# Altium PCB Motor Driver.PcbDoc
Units mil, origin at the board's own origin, x right, y up, seen from the top; angles counter-clockwise.
Board outline 1815.03 x 1805.03 mil, 4 copper layers (Top Layer, Signal Layer, GND, Bottom Layer), stack 23.756 mil thick; 42 components, 39 nets, 193 pads, 56 vias.
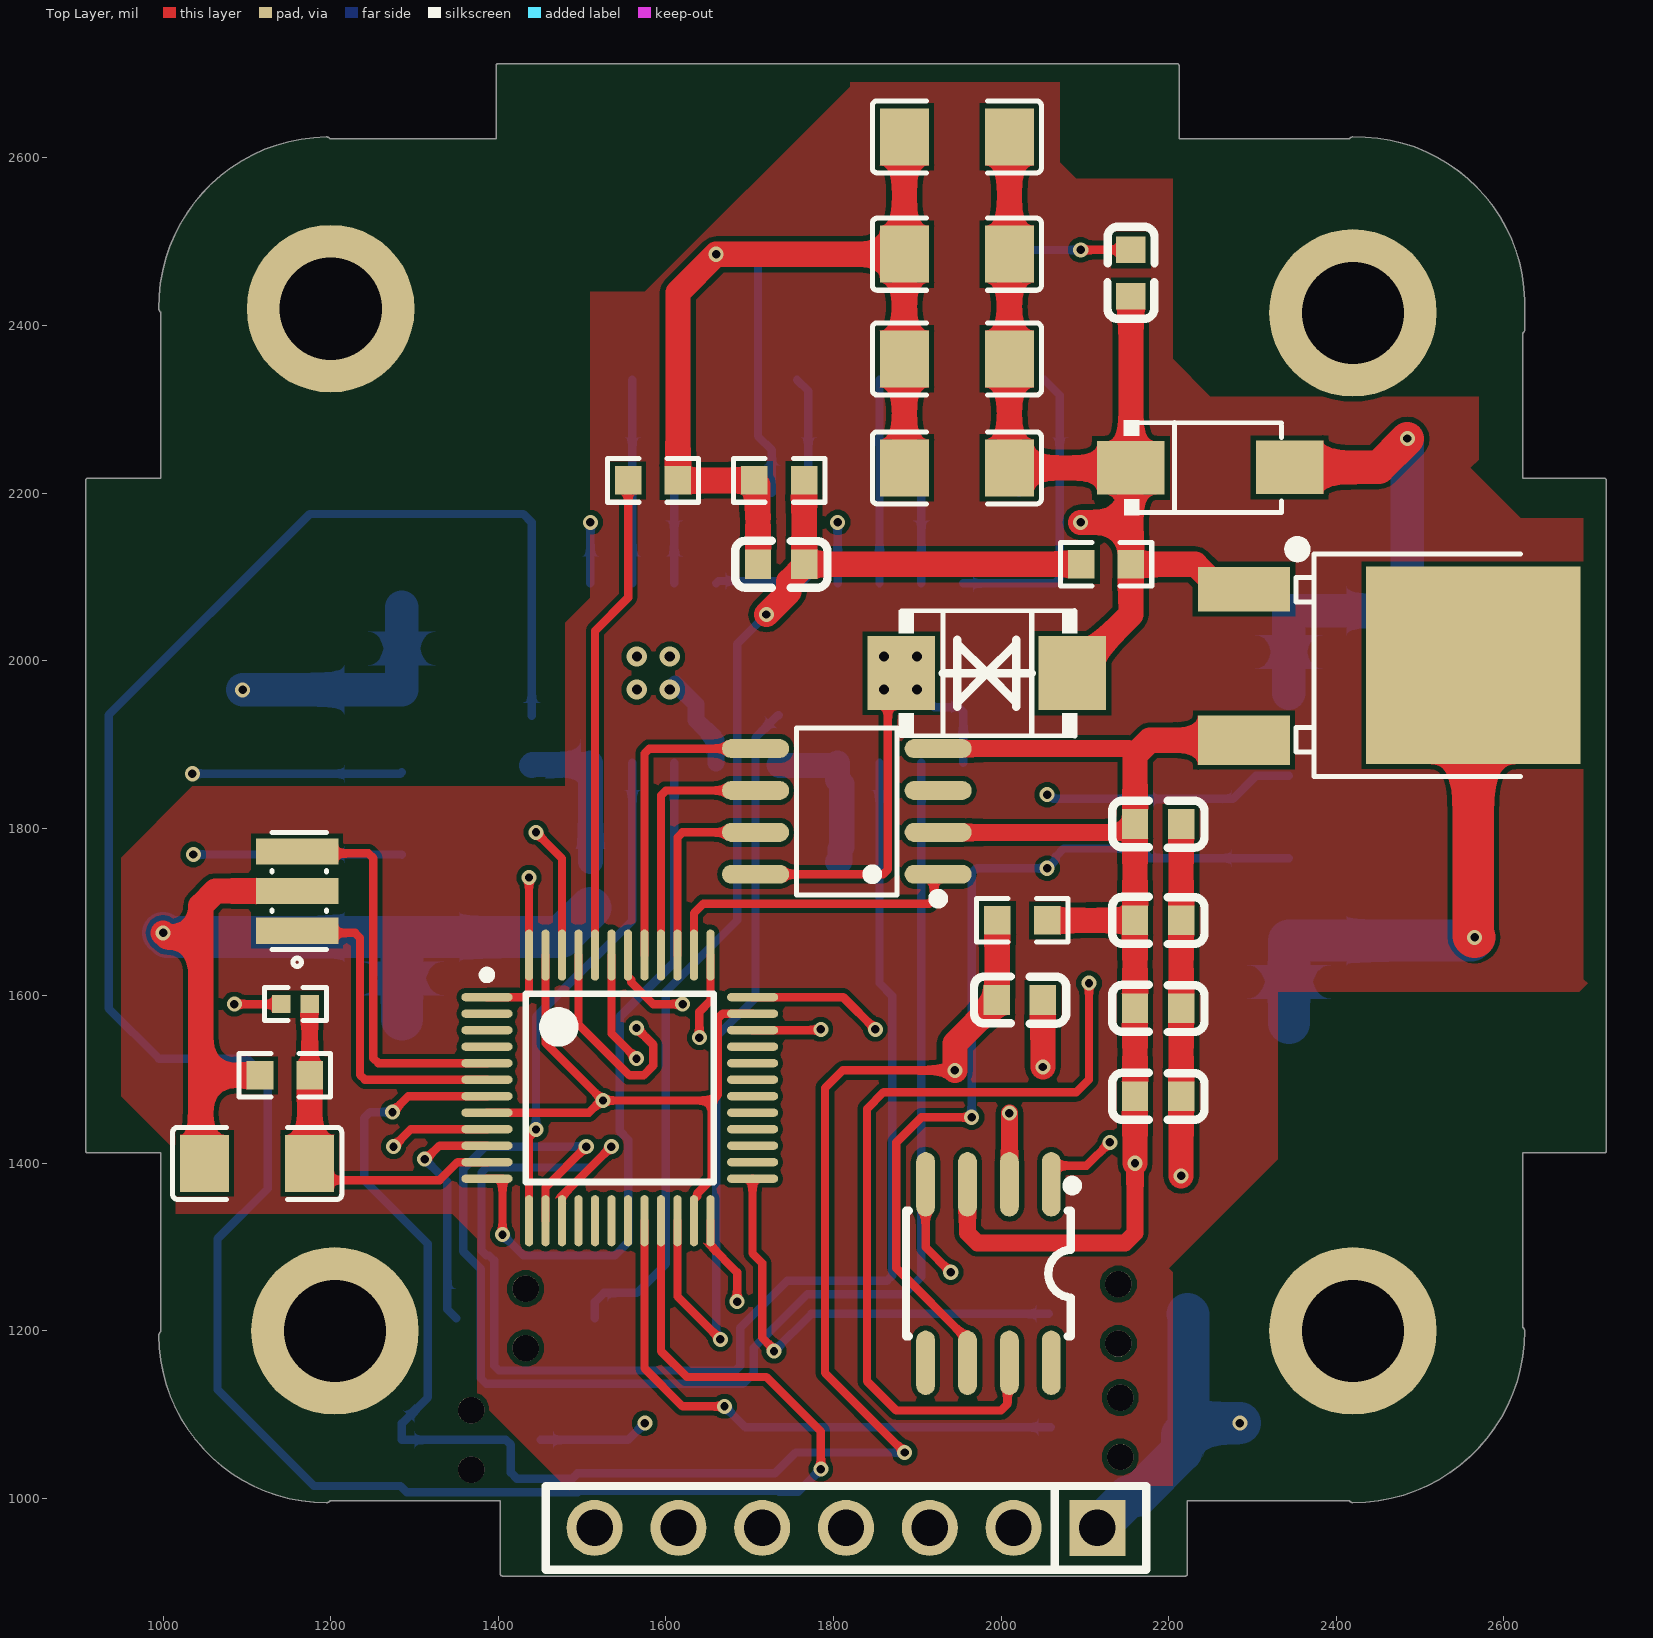
[diagram p0: Top Layer view]
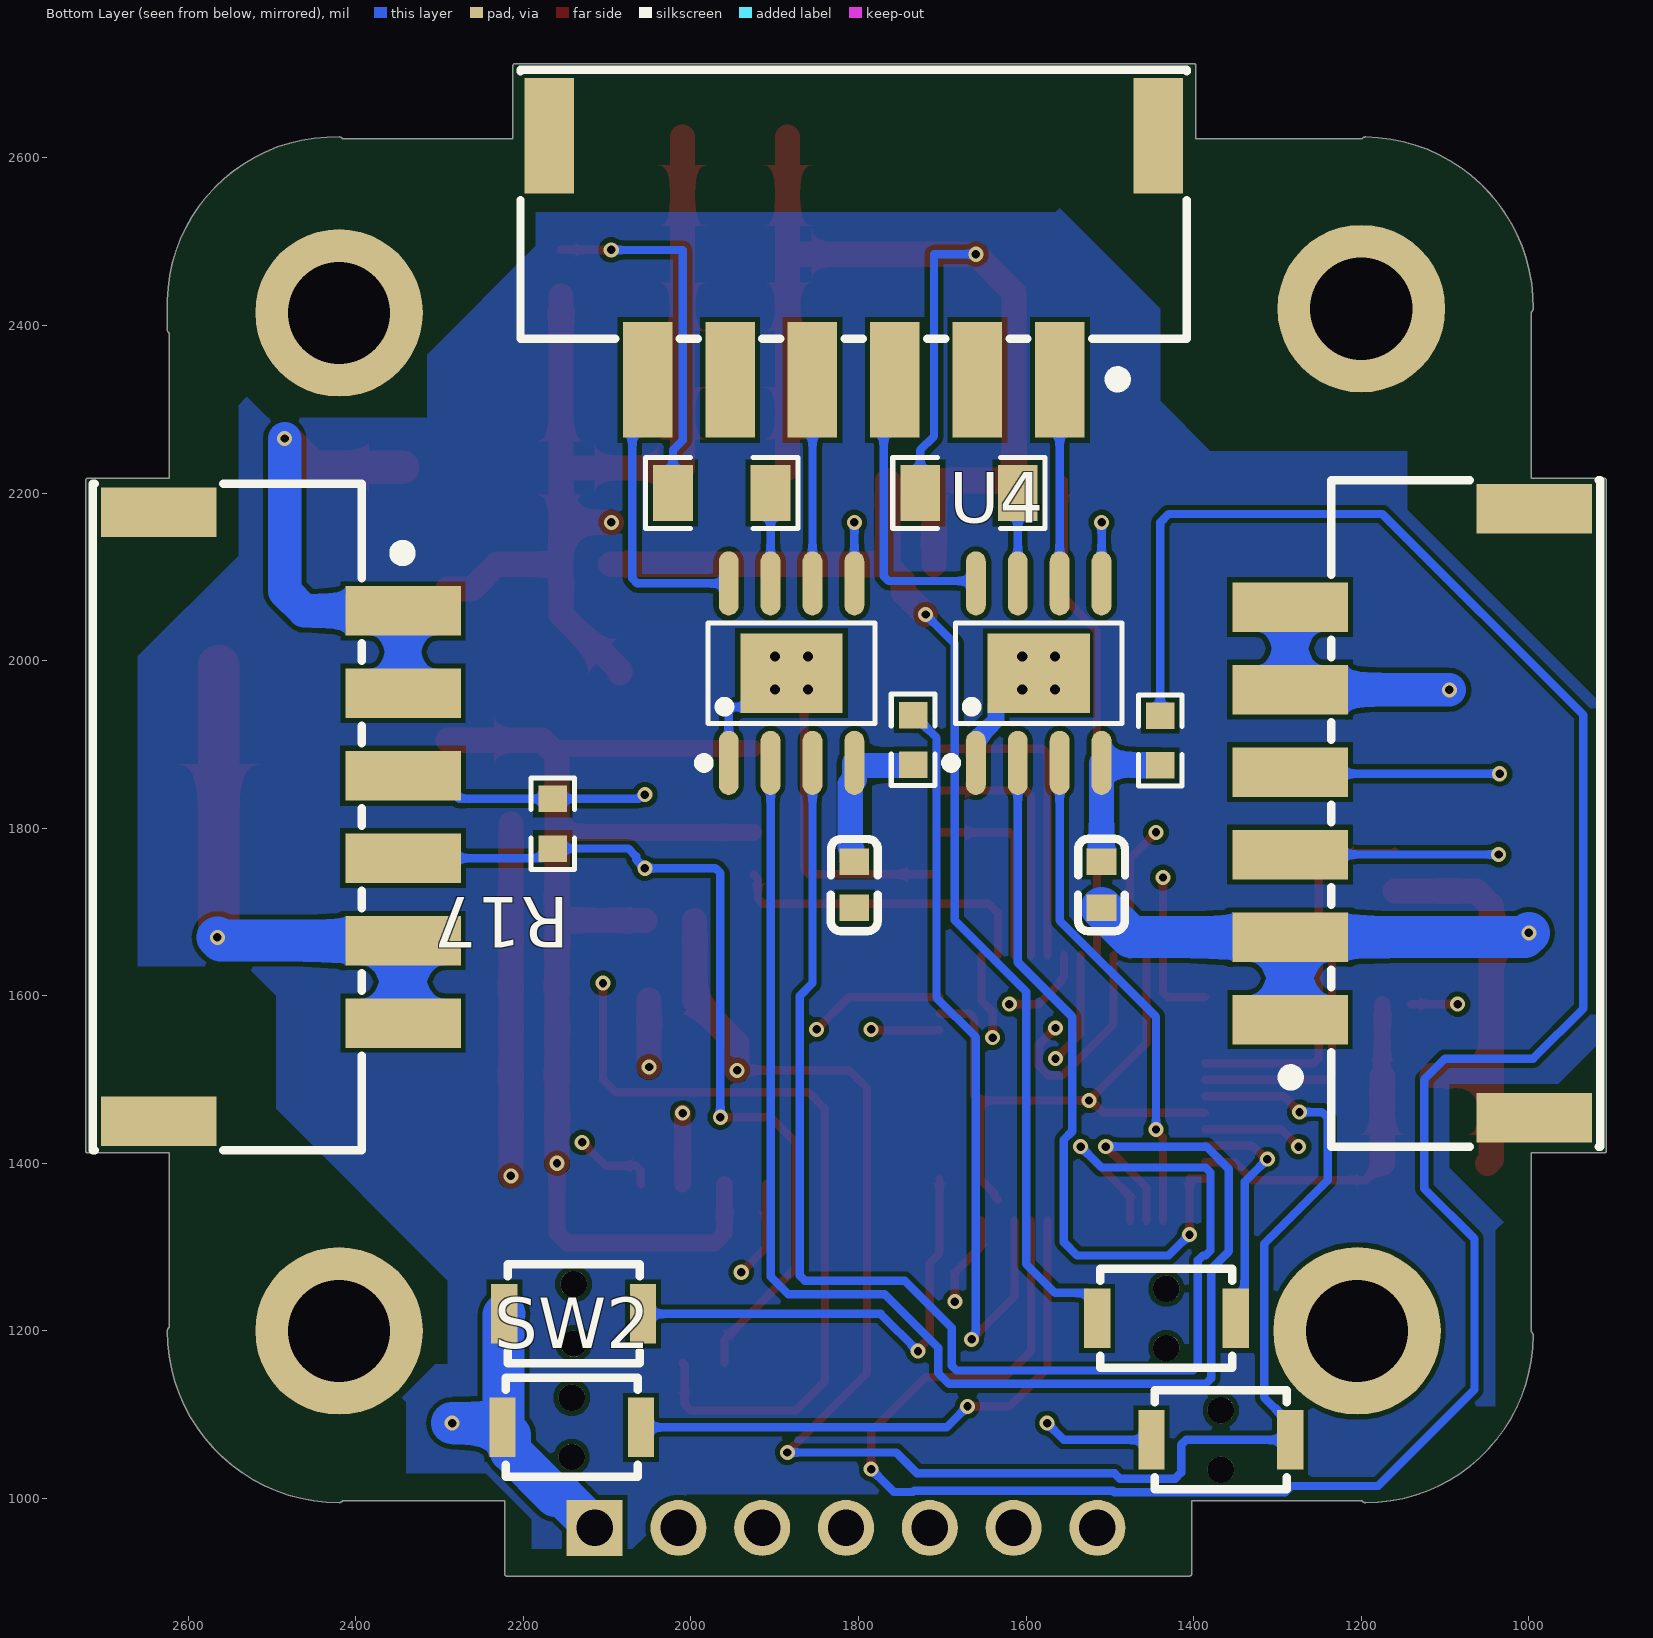
[diagram p1: Bottom Layer view, seen from below]
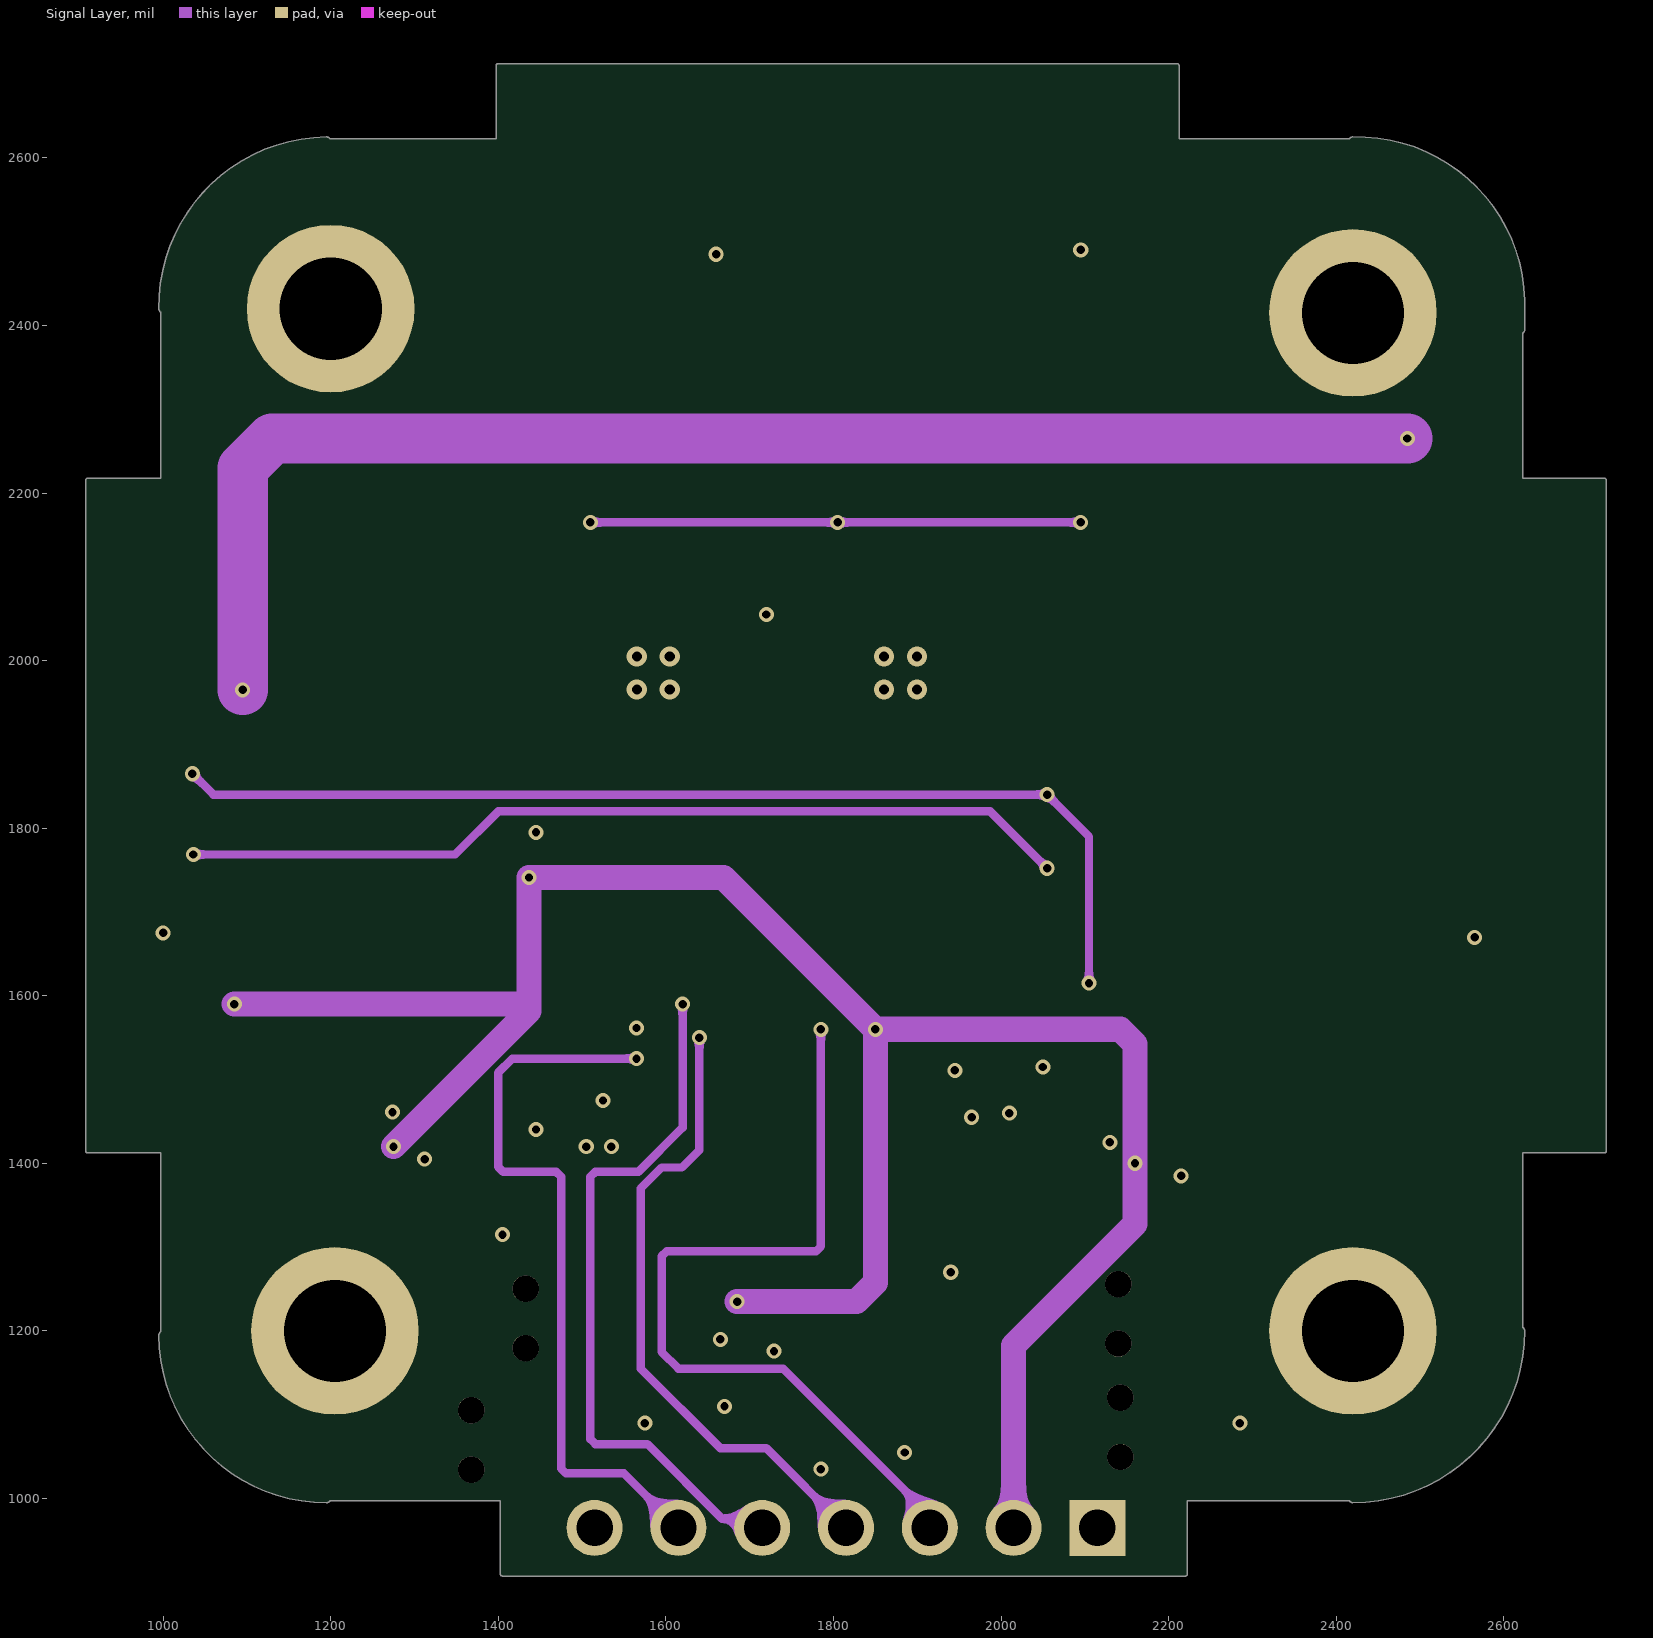
[diagram p2: Signal Layer]
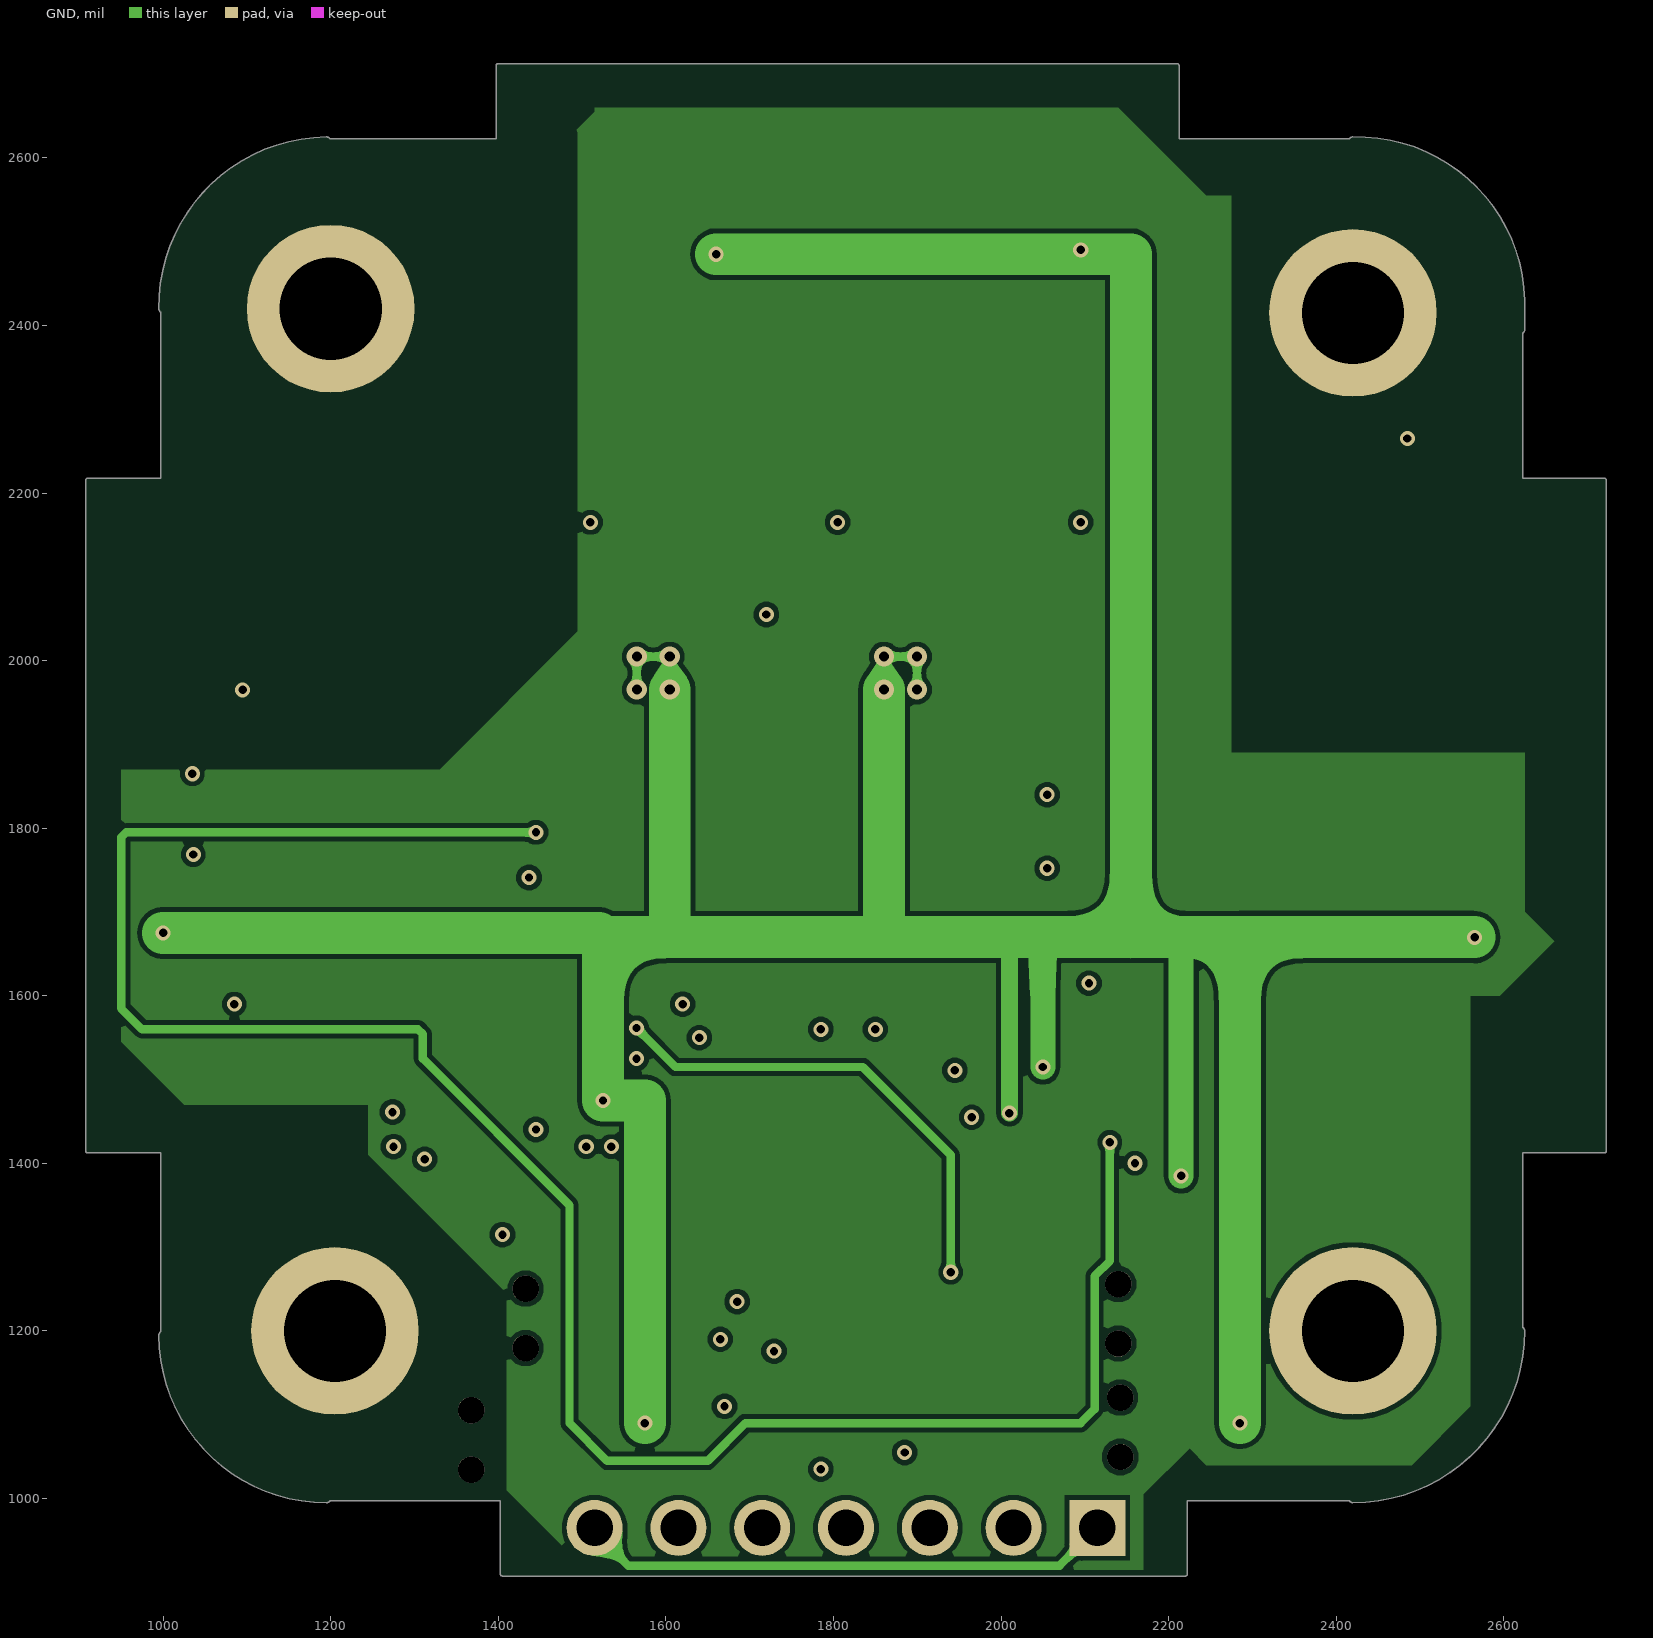
[diagram p3: GND]

## Layer stack, top to bottom
Top Solder: solder mask 0.4, Solder Resist, Dk 3.5
Top Layer: signal copper 1.4
Dielectric 2: prepreg 2.8, PP-006, Dk 4.1
Signal Layer: signal copper 1.378
Dielectric 1: dielectric 12.6, FR-4, Dk 4.8
GND: signal copper 1.378
Dielectric 3: prepreg 2.8, PP-006, Dk 4.1
Bottom Layer: signal copper 1.4
Bottom Solder: solder mask 0.4, Solder Resist, Dk 3.5

## Board outline
994.99,1195 cw(c1000,1195) 997.49,1199.34 997.49,1412.48 910,1412.48 cw(c910,1415) 907.49,1415 907.49,2215 cw(c910,2215) 910,2217.51 997.49,2217.51 997.49,2415.66 cw(c1000,2420) 994.99,2419.94 cw(c1197.5,2422.5) 1194.94,2625.01 cw(c1195,2620) 1199.34,2622.52 1397.48,2622.52 1397.48,2710 cw(c1400,2710) 1400,2712.52 2210,2712.52 cw(c2210,2710) 2212.51,2710 cw(c2210,2710) 2212.51,2710 2212.51,2622.51 2415.66,2622.51 cw(c2420,2620) 2419.87,2625.01 cw(c2425,2425) 2625.01,2430.13 cw(c2620,2430) 2625.01,2430 2625.01,2395 cw(c2620,2395) 2622.51,2390.66 2622.51,2217.51 2720,2217.51 cw(c2720,2215) 2722.51,2215 2722.51,1415 cw(c2720,1415) 2720,1412.48 2622.51,1412.48 2622.51,1204.34 cw(c2620,1200) 2625.01,1200 cw(c2420,1200) 2420,994.99 cw(c2420,1000) 2415.66,997.49 2222.51,997.49 2222.51,910 cw(c2220,910) 2220,907.49 1405,907.49 cw(c1405,910) 1402.48,910 1402.48,997.49 1199.34,997.49 cw(c1195,1000) 1195,994.99 cw(c1195,1195)

## Design rules (kind name [scope] priority, off if disabled: settings)
Clearance [All] p1: gap=6 ignorepadtopadclearanceinfootprint=FALSE
ComponentClearance [All] p1: gap=0 collisioncheckmode=3 verticalgap=0 showdistances=FALSE
HoleSize [All] p1: absolutevalues=TRUE maxlimit=10000 minlimit=8 maxpercent=80.000 minpercent=20.000
MinimumSolderMaskSliver [All] p1: minsoldermaskwidth=1
PolygonConnect [All] p1: connectstyle=Relief reliefconductorwidth=10 reliefentries=4 polygonreliefangle="90 Angle" airgapwidth=10
RoutingVias [All] p1: holewidth=28 width=50 viastyle="Through Hole" minholewidth=28 minwidth=50 maxholewidth=28 maxwidth=50
SilkToSilkClearance [All] p1: silktosilkclearance=0
SilkToSolderMaskClearance [IsPad] p1: minsilkscreentomaskgap=0 clearancetoexposedcopper=TRUE
SolderMaskExpansion [All] p1: expansion=4 istentingtop=FALSE
Width [All] p1: maxlimit=1000 minlimit=10 preferedwidth=10
25 further rules are at their usual default settings.

## Classes and differential pairs
component class Port: R17 SW2
component class Drive: U4

## Components (designator, comment, footprint, x,y, rotation, side; value= is the part's Value field where it differs from the comment)
C1 "100uF" C1206 1947.3,2625 r180 top
C2 "100uF" C1206 1947.3,2485 r180 top
C3 "100uF" C1206 1947.3,2230 r180 top
C4 "100uF" C1206 1947.3,2360 r180 top
C5 "100nF" C0603 2155,2462.55 r270 top
C6 "1uF" C0603 2187.44,1805 r180 top
C7 "1uF" C0603 2187.44,1690 r180 top
C8 "100nF" C0603 2187.45,1585 r180 top
C9 "100nF" C0603 2187.44,1480 r180 top
C14 "100nF" C0603 1805,1732.44 r90 bottom
C16 "100nF" C0603 1510,1732.56 r90 bottom
C18 "10uF" C1206 1112.3,1400 r0 top
C19 "100nF" C0603 2022.44,1595 r180 top
C26 "100nF" C0603 1737.56,2115 r180 top
CN1 "WAFER-254W-6P" CONN-SMD_WAFER-254W-6P 2489.33,1813.38 r270 bottom
CN2 "WAFER-254W-6P" CONN-SMD_WAFER-254W-6P 1139.33,1817.64 r90 bottom
CN3 "WAFER-254W-6P" CONN-SMD_WAFER-254W-6P 1805.79,2480.67 r0 bottom
D1 "SS54" SMA_L4.3-W2.6-LS5.0-RD 2249.65,2230.37 r0 top
D2 "SMBJ28CA" SMB_L4.6-W3.6-LS5.3-BI 1982.98,1985 r0 top
H1 "PZ254V-11-07P" HDR-TH_7P-P2.54-V-M 1815,965 r180 top
R4 "1K" R0603 1735,1905.35 r270 bottom
R6 "1K" R0603 1440,1904.66 r270 bottom
R8 "0.1" R1206 1963.22,2200 r0 bottom
R9 "0.1" R1206 1668.22,2200 r0 bottom
R10 "NTCThermistor" R0402 1157.96,1590 r0 top
R11 "3.3K" R0603_NEW 1145.35,1505 r0 top
R12 "10K" R0603 1584.66,2215 r0 top
R13 "10K" R0603 2025.35,1690 r0 top
R17 "120" R0603 2165,1805.35 r270 bottom
R19 "10K" R0603 2125.34,2115 r180 top
R20 "1K" R0603 1735.34,2215 r180 top
SW1 "K2-1807UA-A4DW-06" KEY-SMD_L4.0-W2.9-L 2140,1220.43 r180 bottom
SW2 "K2-1807UA-A4DW-06" KEY-SMD_L4.0-W2.9-L 2142.32,1085 r180 bottom
SW3 "K2-1807UA-A4DW-06" KEY-SMD_L4.0-W2.9-L 1367.68,1070 r0 bottom
SW4 "K2-1807UA-A4DW-06" KEY-SMD_L4.0-W2.9-L 1432.68,1215 r180 bottom
U1 "L78M05CDT-TR" TO-252-2_L6.5-W6.1-P4.58-LS10.0-TL 2426.81,1995.16 r0 top
U3 "A4950ELJTR-T" SOIC-8_L4.9-W3.9-P1.27-LS6.0-BL-EP 1880,1985 r180 bottom
U4 "A4950ELJTR-T" SOIC-8_L4.9-W3.9-P1.27-LS6.0-BL-EP 1585,1985 r180 bottom
U5 "STM32F103C8T6" STM-LQFP48_L 1545,1490 r0 top
U6 "SN65HVD232DR" SOIC-8_L5.0-W4.0-P1.27-LS6.0-BL 1985,1268.5 r180 top
U7 "MT6816CT-ACD" SOP-8_L5.0-W4.0-P1.27-LS6.0-BL 1816.03,1820 r90 top
X1 "12MHz" CRYSTAL-SMD_3P-L3.2-W1.3-P1.2-BL 1160,1725 r90 top

## Footprints (in the part's own frame and the unit in brackets; to place one, negate y for a bottom-side part, rotate by r counter-clockwise, add the part's x,y. Pads: shape width x height; smd on the part's side, far side on the other; paste and mask are expansions set on the pad)
C0603 [mm]
  rect 0.8x0.9 smd: 1(-0.7,0) 2(0.7,0)
  silkscreen extent -1.41,-0.71 1.39,0.72
C1206 [mm]
  rect 1.485x1.728 smd: 1(-1.593,0) 2(1.593,0)
  silkscreen extent -2.56,-1.09 2.56,1.09
CONN-SMD_WAFER-254W-6P [mm]
  rect 1.5x3.5 smd: 1(-6.25,3.7) 2(-3.75,3.7) 3(-1.25,3.7) 4(1.25,3.7) 5(3.75,3.7) 6(6.25,3.7) 7(-9.23,-3.7) 8(9.23,-3.7)
  silkscreen extent -10.1,-5.7 10.1,3.88
CRYSTAL-SMD_3P-L3.2-W1.3-P1.2-BL [mm]
  rect 0.8x2.5 smd: 1(-1.2,0) 2(0,0) 3(1.2,0)
  silkscreen extent -2.29,-0.89 1.78,0.76
HDR-TH_7P-P2.54-V-M [mm]
  rect 1.7x1.7 hole 1.1: 1(-7.62,0)
  round 1.7 hole 1.1: 2(-5.08,0) 3(-2.54,0) 4(0,0) 5(2.54,0) 6(5.08,0) 7(7.62,0)
  silkscreen extent -9.1,-1.27 9.1,1.27
KEY-SMD_L4.0-W2.9-L [mm]
  rect 0.8x1.8 smd: 1(-2.1,0) 2(2.1,0)
  round 0.8 hole 0.8 unplated: ""(0,-0.9) ""(0,0.9)
  silkscreen extent -2,-1.5 2,1.5
R0402 [mm]
  rect 0.566x0.54 smd: 1(-0.433,0) 2(0.433,0)
  silkscreen extent -0.94,-0.5 0.94,0.5
R0603 [mil]
  rect 31.75x34.02 smd: 1(-29.65,0) 2(29.66,0)
  silkscreen extent -55,-26 55,26
R0603_NEW [mil]
  rect 31.75x34.02 smd: 1(-29.65,0) 2(29.65,0)
  silkscreen extent -55,-26 55,26
R1206 [mil]
  rect 47.54x66.97 smd: 1(-58.22,0) 2(58.22,0)
  silkscreen extent -91,-42 91,42
SMA_L4.3-W2.6-LS5.0-RD [mm]
  rect 2.046x1.62 smd: 1(-2.404,-0.009) 2(2.404,0.009)
  silkscreen extent -2.61,-1.44 2.16,1.44
SMB_L4.6-W3.6-LS5.3-BI [mil]
  rect 80.61x88.23 smd: 1(-102.02,0) 2(102.02,0)
  silkscreen extent -105,-75 108,75
SOIC-8_L4.9-W3.9-P1.27-LS6.0-BL-EP [mm]
  oval 0.602x1.941 smd: 1(-1.905,-2.72) 2(-0.635,-2.72) 3(0.635,-2.72) 4(1.905,-2.72) 5(1.905,2.72) 6(0.635,2.72) 7(-0.635,2.72) 8(-1.905,2.72)
  rect 3.098x2.41 smd: 9(0,0)
  silkscreen extent -2.81,-2.87 2.53,1.52
SOIC-8_L5.0-W4.0-P1.27-LS6.0-BL [mil]
  oval 22.38x76.78 smd: 1(-75,-106.5) 2(-25,-106.5) 3(25,-106.5) 4(75,-106.5) 5(75,106.5) 6(25,106.5) 7(-25,106.5) 8(-75,106.5)
  silkscreen extent -106,-111 98,75
SOP-8_L5.0-W4.0-P1.27-LS6.0-BL [mil]
  oval 22.6x80.14 smd: 1(-75,-108.97) 2(-25,-108.97) 3(25,-108.97) 4(75,-108.97) 5(75,108.97) 6(25,108.97) 7(-25,108.97) 8(-75,108.97)
  silkscreen extent -110,-115 99,60
STM-LQFP48_L [mm] "QFP, 48-Leads, Body 7x7mm, Pitch 0.5mm, IPC High Density"
  oval 1.55x0.25 smd: 1(-4.025,2.75) 2(-4.025,2.25) 3(-4.025,1.75) 4(-4.025,1.25) 5(-4.025,0.75) 6(-4.025,0.25) 7(-4.025,-0.25) 8(-4.025,-0.75) 9(-4.025,-1.25) 10(-4.025,-1.75) 11(-4.025,-2.25) 12(-4.025,-2.75) 25(4.025,-2.75) 26(4.025,-2.25) 27(4.025,-1.75) 28(4.025,-1.25) 29(4.025,-0.75) 30(4.025,-0.25) 31(4.025,0.25) 32(4.025,0.75) 33(4.025,1.25) 34(4.025,1.75) 35(4.025,2.25) 36(4.025,2.75)
  oval 0.25x1.55 smd: 13(-2.75,-4.025) 14(-2.25,-4.025) 15(-1.75,-4.025) 16(-1.25,-4.025) 17(-0.75,-4.025) 18(-0.25,-4.025) 19(0.25,-4.025) 20(0.75,-4.025) 21(1.25,-4.025) 22(1.75,-4.025) 23(2.25,-4.025) 24(2.75,-4.025) 37(2.75,4.025) 38(2.25,4.025) 39(1.75,4.025) 40(1.25,4.025) 41(0.75,4.025) 42(0.25,4.025) 43(-0.25,4.025) 44(-0.75,4.025) 45(-1.25,4.025) 46(-1.75,4.025) 47(-2.25,4.025) 48(-2.75,4.025)
  silkscreen extent -4.15,-2.85 2.85,3.55, body extent -3.5,-3.5 3.5,3.5, height 1.6
TO-252-2_L6.5-W6.1-P4.58-LS10.0-TL [mm]
  rect 2.8x1.35 smd: 1(-3.475,2.29)
  rect 2.8x1.5 smd: 3(-3.475,-2.29)
  rect 6.5x6 smd: 4(3.475,-0.017)
  silkscreen extent -2.06,-3.39 4.9,3.7

## Part data
C1 C2 C3 C4: BOM_JLCPCB Part Class="Extended Part", BOM_Manufacturer="Murata Electronics", BOM_Manufacturer Part=GRM31CR61A107ME05L, BOM_Supplier=LCSC, BOM_Supplier Part=C312983, Contributor=LCSC, nameAlias=Capacitance, spicePre=C, spiceSymbolName=GRM31CR61A107ME05L
C5 C8 C9 C14 C16 C19 C26: BOM_JLCPCB Part Class="Extended Part", BOM_Manufacturer=SAMSUNG, BOM_Manufacturer Part=CL10B104KB8NNNC, BOM_Supplier=LCSC, BOM_Supplier Part=C1591, nameAlias=Capacitance, spicePre=C, spiceSymbolName=CL10B104KB8NNNC
C6 C7: BOM_JLCPCB Part Class="Basic Part", BOM_Manufacturer=SAMSUNG, BOM_Manufacturer Part=CL10A105KB8NNNC, BOM_Supplier=LCSC, BOM_Supplier Part=C15849, nameAlias=Capacitance, spicePre=C, spiceSymbolName=CL10A105KB8NNNC
C18: BOM_JLCPCB Part Class="Basic Part", BOM_Manufacturer=SAMSUNG, BOM_Manufacturer Part=CL31A106KBHNNNE, BOM_Supplier=LCSC, BOM_Supplier Part=C13585, nameAlias=Capacitance, spicePre=C, spiceSymbolName=CL31A106KBHNNNE
CN1 CN2 CN3: BOM_Manufacturer=XUNPU(讯普), BOM_Manufacturer Part=WAFER-254W-6P, BOM_Supplier=LCSC, BOM_Supplier Part=C2856747, Contributor=LCSC, spicePre=C, spiceSymbolName=WAFER-254W-6P
D1: library part SS54_C727065, BOM_JLCPCB Part Class="Extended Part", BOM_Manufacturer=TWGMC, BOM_Manufacturer Part=SS54, BOM_Supplier=LCSC, BOM_Supplier Part=C727065, Contributor=LCSC, spicePre=D, spiceSymbolName=SS54_C727065
D2: library part SMBJ28CA_C908204, BOM_JLCPCB Part Class="Extended Part", BOM_Manufacturer=FUXINSEMI, BOM_Manufacturer Part=SMBJ28CA, BOM_Supplier=LCSC, BOM_Supplier Part=C908204, Contributor=LCSC, spicePre=D, spiceSymbolName=SMBJ28CA_C908204
H1: BOM_JLCPCB Part Class="Extended Part", BOM_Manufacturer=XFCN, BOM_Manufacturer Part=PZ254V-11-07P, BOM_Supplier=LCSC, BOM_Supplier Part=C492406, Contributor=LCSC, spicePre=H, spiceSymbolName=PZ254V-11-07P
R4 R6 R20: BOM_JLCPCB Part Class="Basic Part", BOM_Manufacturer=UniOhm, BOM_Manufacturer Part=0603WAF1001T5E, BOM_Supplier=LCSC, BOM_Supplier Part=C21190, nameAlias="Resistance (Ohms)", spicePre=R, spiceSymbolName=0603WAF1001T5E
R8 R9: BOM_JLCPCB Part Class="Basic Part", BOM_Manufacturer=UniOhm, BOM_Manufacturer Part=1206W4F100LT5E, BOM_Supplier=LCSC, BOM_Supplier Part=C25334, nameAlias="Resistance (Ohms)", spicePre=R, spiceSymbolName=1206W4F100LT5E
R10: BOM_JLCPCB Part Class="Extended Part", BOM_Manufacturer=MuRata, BOM_Manufacturer Part=NCP15XH103F03RC, BOM_Supplier=LCSC, BOM_Supplier Part=C77131, nameAlias=Value, spicePre=R, spiceSymbolName=NCP15XH103F03RC
R11: BOM_JLCPCB Part Class="Basic Part", BOM_Manufacturer=UniOhm, BOM_Manufacturer Part=0603WAF3301T5E, BOM_Supplier=LCSC, BOM_Supplier Part=C22978, nameAlias="Resistance (Ohms)", spicePre=R, spiceSymbolName=0603WAF3301T5E
R12 R13 R19: BOM_JLCPCB Part Class="Basic Part", BOM_Manufacturer=UniOhm, BOM_Manufacturer Part=0603WAF1002T5E, BOM_Supplier=LCSC, BOM_Supplier Part=C25804, nameAlias="Resistance (Ohms)", spicePre=R, spiceSymbolName=0603WAF1002T5E
R17: BOM_JLCPCB Part Class="Basic Part", BOM_Manufacturer=UniOhm, BOM_Manufacturer Part=0603WAF1200T5E, BOM_Supplier=LCSC, BOM_Supplier Part=C22787, nameAlias="Resistance (Ohms)", spicePre=R, spiceSymbolName=0603WAF1200T5E
SW1 SW2 SW3 SW4: BOM_JLCPCB Part Class="Extended Part", BOM_Manufacturer="Korean Hroparts Elec", BOM_Manufacturer Part=K2-1807UA-A4DW-06, BOM_Supplier=LCSC, BOM_Supplier Part=C502307, Contributor=LCSC, spicePre=S, spiceSymbolName=K2-1807UA-A4DW-06
U1: BOM_JLCPCB Part Class="Extended Part", BOM_Manufacturer=STMicroelectronics, BOM_Manufacturer Part=L78M05CDT-TR, BOM_Supplier=LCSC, BOM_Supplier Part=C55509, spicePre=U, spiceSymbolName=L78M05CDT-TR
U3 U4: BOM_JLCPCB Part Class="Extended Part", BOM_Manufacturer=ALLEGRO, BOM_Manufacturer Part=A4950ELJTR-T, BOM_Supplier=LCSC, BOM_Supplier Part=C82404, spicePre=U, spiceSymbolName=A4950ELJTR-T
U5: library part CMP-0237-00215-3, "ARM Cortex-M3 32-bit MCU, 64 KB Flash, 20 KB Internal RAM, 37 I/Os, 48-pin LQFP, -40 to 85 degC, Tray", I/Os (High Current)=37, Operating Frequency(F) (Processor speed) (MHz)=72, Supply Voltage(Vcc) min (V)=2, A/D Converter="2x12-bit (10 Channel)", ComponentLink1Description="Manufacturer URL", ComponentLink1URL=http://www.st.com/web/en/home.html, ComponentLink2Description=Datasheet, ComponentLink2URL=http://www.st.com/st-web-ui/static/active/en/resource/technical/document/datasheet/CD00161566.pdf, ComponentLink3Description="Package Specification", ComponentLink3URL=http://www.st.com/st-web-ui/static/active/en/resource/technical/document/datasheet/DM00058181.pdf, Core="ARM Cortex-M3", DatasheetVersion="Rev. 16", FLASH Size (Prog) (kB)=64, Internal RAM Size (kB)=20, Mounting Technology="Surface Mount", PackageDescription="48-Pin Low Profile Quad Flat Package, 7 x 7 mm Body, 0.5 mm Pitch", PackageReference=LQFP48, PackageVersion="Rev. 6, 06/2013", Packing=Tray, PartNumber=STM32F103C8T6
U6: BOM_JLCPCB Part Class="Extended Part", BOM_Manufacturer=TI, BOM_Manufacturer Part=SN65HVD232DR, BOM_Supplier=LCSC, BOM_Supplier Part=C30530, spicePre=U, spiceSymbolName=SN65HVD232DR
U7: BOM_JLCPCB Part Class="Extended Part", BOM_Manufacturer="Magn Tek", BOM_Manufacturer Part=MT6816CT-ACD, BOM_Supplier=LCSC, BOM_Supplier Part=C879560, Contributor=LCSC, spicePre=U, spiceSymbolName=MT6816CT-ACD
X1: BOM_JLCPCB Part Class="Extended Part", BOM_Manufacturer=muRata(村田), BOM_Manufacturer Part=CSTNE12M0G52A000R0, BOM_Supplier=LCSC, BOM_Supplier Part=C907957, Contributor=LCSC, nameAlias=Frequency, spicePre=X, spiceSymbolName=CSTNE12M0G52A000R0

## Free pads (board coordinates)
  round 200 hole 122: GND(1200,2420) GND(1205,1200) GND(2420,1200) GND(2420,2415)

## Via types
v1: diameter 18, hole 10, Top Layer to Bottom Layer, 48 vias
v2: diameter 24, hole 12, Top Layer to Bottom Layer, 8 vias

## Nets (pads, with @x,y where several pads share a name; then routed paths per layer and width w, separated by ;. In a path a pad name is that pad's centre, name@x,y a point inside that pad or via, vN(x,y) a via of type N, cw(c..) or ccw(c..) an arc to the next point about the centre after c; other vN are vias at no path point)
BUTTON_1: SW1.2 U5.25 | length 563.2
  Top Layer w10: U5.25 1703.46,1292.68 1715,1281.14 1715,1192.16 1729.14,1178.02 v1(1729.14,1175.86)
  Bottom Layer w10: v1(1729.14,1175.86) 1773.71,1220.43 SW1.2
BUTTON_2: SW2.2 U5.20 | length 690.4
  Top Layer w10: U5.20 1574.53,1155.47 1620,1110 v1(1670,1110)
  Bottom Layer w10: v1(1670,1110) 1695,1085 SW2.2
CAN_H: CN1.3 CN2.4 R17.1 U6.7 | length 2784.1
  Top Layer w10: U6.7 2007.63,1159.63 2007.63,1112.63 2000,1105 1875,1105 1840,1140 1840,1465 1860,1485 2090,1485 2105,1500 v1(2105,1615)
  Signal Layer w10: v1(1035,1865) 1060,1840 v1(2055,1840) 2105,1790 v1(2105,1615)
  Bottom Layer w10: v1(1035,1865) 1283.15,1865 CN2.4 ; v1(2055,1840) 2057.16,1840 2062.16,1835 R17.1 2276.69,1835 2304.29,1862.6 CN1.3
CAN_L: CN1.4 CN2.3 R17.2 U6.6 | length 2407.2
  Top Layer w10: U6.6 1960,1190 1875,1275 1875,1425 1905,1455 v1(1965,1455)
  Signal Layer w10: v1(1036.04,1768.56) 1348.56,1768.56 1400,1820 1987.16,1820 v1(2055,1752.16)
  Bottom Layer w10: v1(1036.04,1768.56) 1284.86,1768.56 CN2.3 ; v1(1965,1455) 1965,1746.31 1970.86,1752.16 v1(2055,1752.16) 2065.42,1762.58 2065.42,1766.45 2074.65,1775.69 R17.2 2166.13,1775.69 2177.65,1764.17 CN1.4
CAN_RX: U5.45 U6.4 | length 950.1
  Top Layer w10: U5.45 1495.79,1565.93 1556.72,1505 1573.28,1505 1585,1516.72 1585,1541.53 v1(1565,1561.53) ; U6.4 1910,1300 v1(1940,1270)
  GND w10: v1(1565,1561.53) 1611.53,1515 1835,1515 1940,1410 v1(1940,1270)
CAN_TX: U5.46 U6.1 | length 2867.4
  Top Layer w10: v1(1445,1795) 1476.1,1763.9 U5.46 ; U6.1 2060,1391.48 2065.72,1397.2 2102.09,1397.2 v1(2129.89,1425)
  GND w10: v1(1445,1795) 955.86,1795 950,1789.14 950,1585 975,1560 1304.14,1560 1310,1554.14 1310,1525 1485,1350 1485,1090 1530,1045 1650,1045 1695,1090 2095,1090 2111.68,1106.68 2111.68,1265.37 2129.89,1283.58 v1(2129.89,1425)
GND: C1.2 C2.2 C3.2 C4.2 C5.1 C6.1 C7.1 C8.1 C9.1 C16.1 C18.1 C19.1 C26.2 CN1.5 CN1.6 CN2.1 CN2.2 D2.1 H1.1 H1.7 R8.2 R9.2 R11.1 R12.2 R20.2 SW1.1 SW2.1 SW3.2 U1.4 U3.1 U3.9 U4.1 U4.9 U5.8 U5.23 U5.35 U5.47 U6.2 U7.8 X1.2 | length 12366.4
  Top Layer w10: U5.8 1508.31,1460.47 1522.84,1475 v1(1525,1475) ; U5.47 1456.42,1543.58 v1(1525,1475) ; U5.23@1633.66,1357.05 1637.35,1360.73 1637.35,1363.72 1655,1381.37 1655,1475 ; U5.35 1667.81,1578.58 1661.95,1572.72 1661.95,1481.95 1655,1475 ; U7.8 1859.14,1745 1865,1750.86 D2.1@1865,1965.31 ; v1(2095.11,2490.11) C5.1 ; v1(1525,1475) 1655,1475
  Top Layer w20: U6.2 v1(2010,1460)
  Top Layer w30: v1(1000,1675) 1005,1670 1045,1670 ; C18.1 1045,1404.61 1045,1505 ; R11.1 1045,1505 ; X1.2 1062.57,1725 1045,1707.43 1045,1670 ; C26.2 1710,2209.56 1705.69,2213.87 R20.2 R12.2 1614.31,2439.31 v1(1660,2485) C2.2 ; C3.2 C4.2 C2.2 ; C1.2 C2.2 ; v1(2050,1515) C19.1 ; v1(2215,1385) C9.1 C8.1 C7.1 C6.1 ; 1045,1505 1045,1670
  Top Layer w50: U1.4 2563.62,1671.38 v1(2565.22,1669.78)
  GND w10: H1.7 1515,960 1555,920 2070,920 H1.1 ; v2(1565.31,1965.31) v2(1565.31,2004.68) v2(1604.68,2004.68) v2(1604.68,1965.31) ; v2(1860.31,1965.31) v2(1860.31,2004.68) v2(1899.68,2004.68) v2(1899.68,1965.31)
  GND w20: v1(2010,1460) 2010,1665 2015,1670
  GND w30: v1(2050,1515) 2050,1670 ; v1(2215,1385) 2215,1665 2220,1670
  GND w50: v1(1000,1675) 1520,1675 1525,1670 ; v1(1575,1090) 1575,1475 v1(1525,1475) 1525,1670 ; v2(1604.68,1965.31) 1604.68,1670.32 1605,1670 ; v1(1660,2485) 2155,2485 2155,1670 ; v2(1860.31,1965.31) 1860.31,1670.31 1860,1670 ; v1(2285,1090) 2285,1670 ; v1(2565.22,1669.78) 2565,1670 2285,1670 ; 1525,1670 1605,1670 ; 1605,1670 1860,1670 ; 1860,1670 2015,1670 2050,1670 2155,1670 ; 2155,1670 2220,1670 2285,1670
  Bottom Layer w10: SW3.2 1555,1070 v1(1575,1090) ; v1(1660,2485) 1710,2485 1710,2267.59 1726.44,2251.16 R9.2 ; v2(1899.68,1965.31) 1920.5,1944.5 1949.14,1944.5 1955,1938.65 U3.1 ; R8.2 2021.44,2251.43 2010,2262.87 2010,2490 2095,2490 v1(2095.11,2490.11)
  Bottom Layer w20: U4.9@1611.46,1972.09 1635.98,1947.56 1635.98,1929.27 1660,1905.25 U4.1
  Bottom Layer w50: v1(1000,1675) 1005,1670 CN2.2 ; CN2.1 CN2.2 ; C16.1 1475,1670 CN2.2 ; H1.7 H1.7@1516.34,966.34 ; H1.1 2152.82,1002.82 2161.68,1002.82 2215.75,1056.89 2215.75,1075.75 SW2.1 ; SW1.1 2223.84,1219.27 2223.84,1086.16 SW2.1 ; v1(2285,1090) 2230,1090 SW2.1 ; CN1.6 CN1.5 2561.18,1665.75 v1(2565.22,1669.78)
IN_AM: U3.2 U5.14 | length 1737.1
  Top Layer w10: U5.14 1456.42,1371.42 v1(1505,1420)
  Bottom Layer w10: v1(1505,1420) 1385,1420 1358.23,1393.23 1358.23,1295 1379,1274.23 1379,1143.68 1385.86,1136.82 1691.82,1136.82 1705,1150 1705,1180 1769,1244 1884.14,1244 1905,1264.86 U3.2
IN_AP: U3.3 U5.15 | length 1688.3
  Top Layer w10: U5.15 1476.1,1361.1 v1(1535,1420)
  Bottom Layer w10: v1(1535,1420) 1510,1395 1385.86,1395 1380,1389.14 1380,1295.86 1385.86,1290 1389.14,1290 1395,1284.14 1395,1158.68 1400.86,1152.82 1683.14,1152.82 1689,1158.68 1689,1204 1745,1260 1864.14,1260 1870,1265.86 1870,1600 1855,1615 U3.3
IN_BM: U4.2 U5.12 | length 855.2
  Top Layer w10: U5.12 1404.92,1381.73 1405,1381.65 v1(1405,1315)
  Bottom Layer w10: v1(1405,1315) 1430,1290 1539.14,1290 1555,1305.86 1555,1428.28 1545,1438.28 1545,1575 1610,1640 U4.2
IN_BP: U4.3 U5.13 | length 597.4
  Top Layer w10: U5.13 1436.73,1430.61 1445,1438.88 v1(1445,1440.47)
  Bottom Layer w10: v1(1445,1440.47) 1445,1575 1560,1690 U4.3
IN_PWM_A: R4.1 U5.22 | length 941.5
  Top Layer w10: U5.22 1613.9,1241.1 v1(1665,1190)
  Bottom Layer w10: v1(1665,1190) 1665,1192.16 1660,1197.16 1660,1550.57 1706.99,1597.56 1706.99,1908.12 1733.87,1935 R4.1
IN_PWM_B: R6.1 U5.21 | length 3024
  Top Layer w10: U5.21 1594.21,1175.79 1625,1145 1720,1145 1785,1080 v1(1785,1035)
  Bottom Layer w10: R6.1 1440,2165 1430,2175 1175,2175 935,1935 935,1585 995,1525 1100,1525 1125,1500 1125,1370 1065,1310 1065,1130 1180,1015 1283.29,1015 1290.72,1007.57 1494.68,1007.57 1496.58,1009.46 1733.42,1009.46 1735.06,1007.82 1757.82,1007.82 v1(1785,1035)
MT6816_CS: U5.38 U7.1 | length 374.9
  Top Layer w10: U5.38 1633.58,1698.58 1645,1710 1914.14,1710 1920,1715.86 1920,1739.18 1925,1744.18 U7.1
NetC19_2: C19.2 R13.1 SW3.1 U5.7 | length 2075.6
  Top Layer w10: v1(1273.79,1461.21) 1292.73,1480.16 U5.7 ; v1(1885,1055) 1790,1150 1790,1490 1811,1511 v1(1945,1511)
  Top Layer w30: v1(1945,1511) 1945,1543.14 1994.89,1593.03 C19.2 1994.89,1596.97 1995.69,1597.77 R13.1
  Bottom Layer w10: v1(1273.79,1461.21) 1247.07,1461.21 1240,1454.14 1240,1380 1316,1304 1316,1120.68 1285,1089.68 SW3.1 1409.14,1070 1415,1064.14 1415,1030.86 1422.29,1023.57 1488.06,1023.57 1494.49,1030 1730,1030 1755,1055 v1(1885,1055)
NetR8_1: R8.1 U3.7 | length 107.9
  Bottom Layer w10: U3.7 R8.1
NetR9_1: R9.1 U4.7 | length 107.9
  Bottom Layer w10: U4.7 R9.1
NetR12_1: R12.1 U5.44 | length 582.9
  Top Layer w10: U5.44 1515.47,2035.47 1555,2075 R12.1
NetSW4_2: SW4.2 U5.10 | length 286.7
  Top Layer w10: v1(1312.15,1405) 1313.89,1405 1329.99,1421.1 U5.10
  Bottom Layer w10: v1(1312.15,1405) 1339.25,1377.9 1339.25,1225.75 SW4.2
NetU5_5: U5.5 X1.3 | length 471.1
  Top Layer w10: X1.3 1162.24,1770 1245.14,1770 1251,1764.14 1251,1525.39 1256.86,1519.53 U5.5
NetU5_6: U5.6 X1.1 | length 396
  Top Layer w10: X1.1 1162.76,1675 1229.14,1675 1235,1669.14 1235,1505.7 1240.86,1499.84 U5.6
OUT_A+: CN3.4 U3.6 | length 242.9
  Bottom Layer w10: U3.6 CN3.4
OUT_A-: CN3.6 U3.8 | length 362
  Bottom Layer w10: U3.8 2064.14,2092.11 2070,2097.96 2070,2316.85 CN3.6
OUT_B+: CN3.1 U4.6 | length 243
  Bottom Layer w10: CN3.1 1560,2334.72 U4.6
OUT_B-: CN3.3 U4.8 | length 353.3
  Bottom Layer w10: U4.8 1662.89,2095 1764.14,2095 1770,2100.86 1770,2321.57 CN3.3
POWER_U: C26.1 R19.2 R20.1 SW4.1 | length 1457.1
  Top Layer w10: R20.1 R20.1@1765.11,2214.89
  Top Layer w30: v1(1720,2055) 1746.75,2081.75 1746.75,2094.67 1765.11,2113.03 C26.1 ; R20.1@1765.11,2214.89 C26.1 ; R19.2 C26.1
  Bottom Layer w10: SW4.1 1515.35,1234.68 1526.1,1245.43 1565.43,1245.43 1600,1280 1600,1605 1685,1690 1685,2020 v1(1720,2055)
SPI1_MISO: U5.40 U7.6 | length 306
  Top Layer w10: U5.40 1594.21,1839.14 1600.07,1845 U7.6
SPI1_MOSI: U5.41 U7.5 | length 375.6
  Top Layer w10: U5.41 1574.53,1889.14 1580.39,1895 U7.5
SPI1_SCK: U5.39 U7.7 | length 236.3
  Top Layer w10: U5.39 1613.9,1789.14 1619.76,1795 U7.7
SWCLK: H1.4 U5.37 | length 865.8
  Top Layer w10: v1(1640,1550) 1640,1580.92 1653.27,1594.19 U5.37
  Signal Layer w10: v1(1640,1550) 1640,1415.86 1619.14,1395 1595,1395 1570,1370 1570,1155 1665,1060 1720,1060 H1.4
SWDIO: H1.3 U5.34 | length 1065.9
  Top Layer w10: U5.34 1703.54,1558.98 1783.98,1558.98 v1(1785,1560)
  Signal Layer w10: v1(1785,1560) 1785,1300.86 1779.14,1295 1600.86,1295 1595,1289.14 1595,1175 1615,1155 1740,1155 1915,980 H1.3
TEMP: C18.2 R10.2 R11.2 U5.11 | length 418.7
  Top Layer w10: C18.2 1195,1380 1330.1,1380 1351.52,1401.42 U5.11
  Top Layer w20: R11.2 R10.2
  Top Layer w30: C18.2 R11.2
UART1_RX: H1.6 U5.43 | length 1017.6
  Top Layer w10: U5.43 1535.16,1554.84 v1(1565,1525)
  Signal Layer w10: v1(1565,1525) 1416.77,1525 1400,1508.23 1400,1395.86 1405.86,1390 1469.14,1390 1475,1384.14 1475,1035.86 1480.86,1030 1550,1030 H1.6
UART1_TX: H1.5 U5.42 | length 949.8
  Top Layer w10: U5.42 1554.84,1623.03 1558.61,1619.27 1558.61,1616.28 1584.89,1590 v1(1620,1590)
  Signal Layer w10: v1(1620,1590) 1620,1442.63 1567.37,1390 1515.86,1390 1510,1384.14 1510,1070.86 1515.86,1065 1577.88,1065 1666.99,975.89 1704.11,975.89 H1.5
VCC: C1.1 C2.1 C3.1 C4.1 C5.2 D1.1 D2.2 R19.1 U1.1 U3.5 U4.5 | length 1959.3
  Top Layer w30: C1.1 C2.1 C4.1 C3.1 D1.1 ; D2.2 2085,1988.81 2110.3,2014.11 2114.11,2014.11 2155,2055 R19.1 ; v1(2095,2165) 2155,2165 ; C5.2 D1.1 ; U1.1 2261.45,2085.32 2231.77,2115 R19.1 ; R19.1 2155,2165 ; 2155,2165 D1.1
  Signal Layer w10: v1(1510,2165) v1(1805,2165) v1(2095,2165)
  Bottom Layer w10: U4.5 v1(1510,2165) ; U3.5 v1(1805,2165)
VCC_3V3: C6.2 C7.2 C8.2 C9.2 H1.2 R10.1 R13.2 U1.3 U5.1 U5.9 U5.24 U5.36 U5.48 U6.3 U7.2 U7.4 | length 4859.9
  Top Layer w10: v1(1085,1590) R10.1 ; v1(1275,1420) 1295.79,1440.79 U5.9 ; U5.1 1430.87,1598.27 1436.73,1604.13 U5.48 v1(1436.73,1741.1) ; U5.24 1653.27,1301.73 1685,1270 v1(1685,1235) ; U5.36 1811.73,1598.27 v1(1850,1560)
  Top Layer w20: U7.2 2151.86,1795 2159.89,1803.03 2160,1803.14 C6.2@2160,1805.11 ; U7.4 2152.43,1895 2160,1887.43 ; U6.3 1960,1316.72 1971.72,1305 2148.17,1305 2159.89,1316.72 v1(2159.89,1400.11)
  Top Layer w30: R13.2 C7.2 ; v1(2159.89,1400.11) C9.2 C8.2 C7.2 ; C6.2 2159.89,1803.03 C7.2 ; C6.2@2160,1805.11 2160,1887.43 2177.57,1905 U1.3
  Signal Layer w30: v1(1085,1590) 1428.46,1590 1436.73,1581.73 ; v1(1275,1420) 1436.73,1581.73 ; v1(1685,1235) 1827.43,1235 1850,1257.57 v1(1850,1560) ; H1.2 2015,1182.83 2159.89,1327.72 v1(2159.89,1400.11) 2160,1400.22 2160,1542.43 2142.43,1560 v1(1850,1560) ; 1436.73,1581.73 v1(1436.73,1741.1) 1668.9,1741.1 v1(1850,1560)
VCC_IN: CN1.1 CN1.2 CN2.5 CN2.6 D1.2 | length 2544.4
  Top Layer w40: D1.2 2450.74,2230.74 v1(2485,2265)
  Signal Layer w60: v1(1095,1965) 1095,2229.85 1130.15,2265 v1(2485,2265)
  Bottom Layer w40: v1(1095,1965) 1095.28,1965.28 CN2.5 CN2.6 ; CN1.2 CN1.1 2461.57,2059.45 2485,2082.88 v1(2485,2265)
VREF_A: C14.2 R4.2 U3.4 | length 194.7
  Bottom Layer w30: R4.2 1735.69,1875 1802.11,1875 U3.4 1805,1857.84 1810,1852.84 1810,1777.25 1807.72,1774.97 1807.72,1760.75 1806.97,1760 C14.2
VREF_B: C16.2 R6.2 U4.4 | length 189
  Bottom Layer w30: R6.2 1440.88,1875.88 1507.98,1875.88 U4.4 C16.2
pads on no net: C14.1 CN1.7 CN1.8 CN2.7 CN2.8 CN3.2 CN3.5 CN3.7 CN3.8 SW1. SW2. SW3. SW4. U5.2 U5.3 U5.4 U5.16 U5.17 U5.18 U5.19 U5.26 U5.27 U5.28 U5.29 U5.30 U5.31 U5.32 U5.33 U6.5 U6.8 U7.3

## Polygon pours and split planes (outlines as drawn)
no net on Top Layer "NONET_L01_P000" (solid, pour order 0): 1820,2685 1575,2440 1510,2440 1510,2075 1480,2045 1480,1850 1035,1850 950,1765 950,1480 1015,1415 1015,1340 1345,1340 1375,1310 1375,1120 1485,1010 1490,1015 2205,1015 2205,1270 2200,1275 2330,1405 2330,1605 2690,1605 2700,1615 2695,1620 2695,2170 2620,2170 2560,2230 2570,2240 2570,2315 2250,2315 2205,2360 2205,2575 2090,2575 2070,2595 2070,2690 1820,2690
no net on GND "NONET_L03_P003" (solid, pour order 3): 1495,2630 1495,2035 1330,1870 950,1870 950,1545 1025,1470 1245,1470 1245,1410 1410,1245 1410,1010 1505,915 2170,915 2170,1005 2225,1060 2245,1040 2490,1040 2560,1110 2560,1600 2595,1600 2660,1665 2625,1700 2625,1890 2275,1890 2275,2555 2245,2555 2140,2660 1515,2660 1515,2655 1490,2630
no net on Bottom Layer "NONET_L04_P002" (solid, pour order 2): 1145,2250 1145,2180 920,1955 920,1540 965,1495 1095,1495 1095,1395 1030,1330 1040,1320 1040,1110 1070,1110 1175,1005 2005,1005 2070,940 2190,940 2190,975 2245,1030 2340,1030 2340,1115 2345,1120 2305,1160 2290,1160 2290,1260 2495,1465 2495,1600 2530,1635 2660,1635 2660,2005 2540,2125 2540,2305 2530,2315 2505,2290 2315,2290 2315,2365 2185,2495 2185,2535 1565,2535 1560,2540 1440,2420 1440,2310 1380,2250

## Silkscreen, mask and mechanical layers (free items; w line width, h text height)
Mechanical 1:
  lines w5: 1000,1195 1000,1415 ; 1000,2420 1000,2215 910,2215 910,1415 1000,1415 ; 1195,1000 1405,1000 ; 1195,2620 1400,2620 1400,2710 2210,2710 2210,2620 2420,2620 ; 1812.5,1000 1405,1000 ; 1815,1000 1815,1875 ; 2420,1000 2235,1000 2220,1000 2220,910 1405,910 1405,1000 ; 2580,1810 2580,1815 1000,1815 1000,1415 ; 2615,2215 2630,2215 2720,2215 ; 2620,1200 2620,1415 2710,1415 2720,1415 2720,2215 ; 2620,2395 2620,2215 2622.5,2215 ; 2710,2215 2720,2215
  lines w10: 1000,1195 ccw(c1195,1195) 1195,1000 ; 1000,2420 cw(c1197.5,2422.5) 1195,2620 ; 2420,1000 ccw(c2420,1200) 2620,1200 ; 2420,2620 cw(c2425,2425) 2620,2430 2620,2395